# Altium PCB pcb.pcbdoc
Units mil, origin at the board's own origin, x right, y up, seen from the top; angles counter-clockwise.
Board outline 1573.37 x 1441.65 mil, 2 copper layers (Top Layer, Bottom Layer); 4 components, 6 nets, 24 pads, 1 vias.
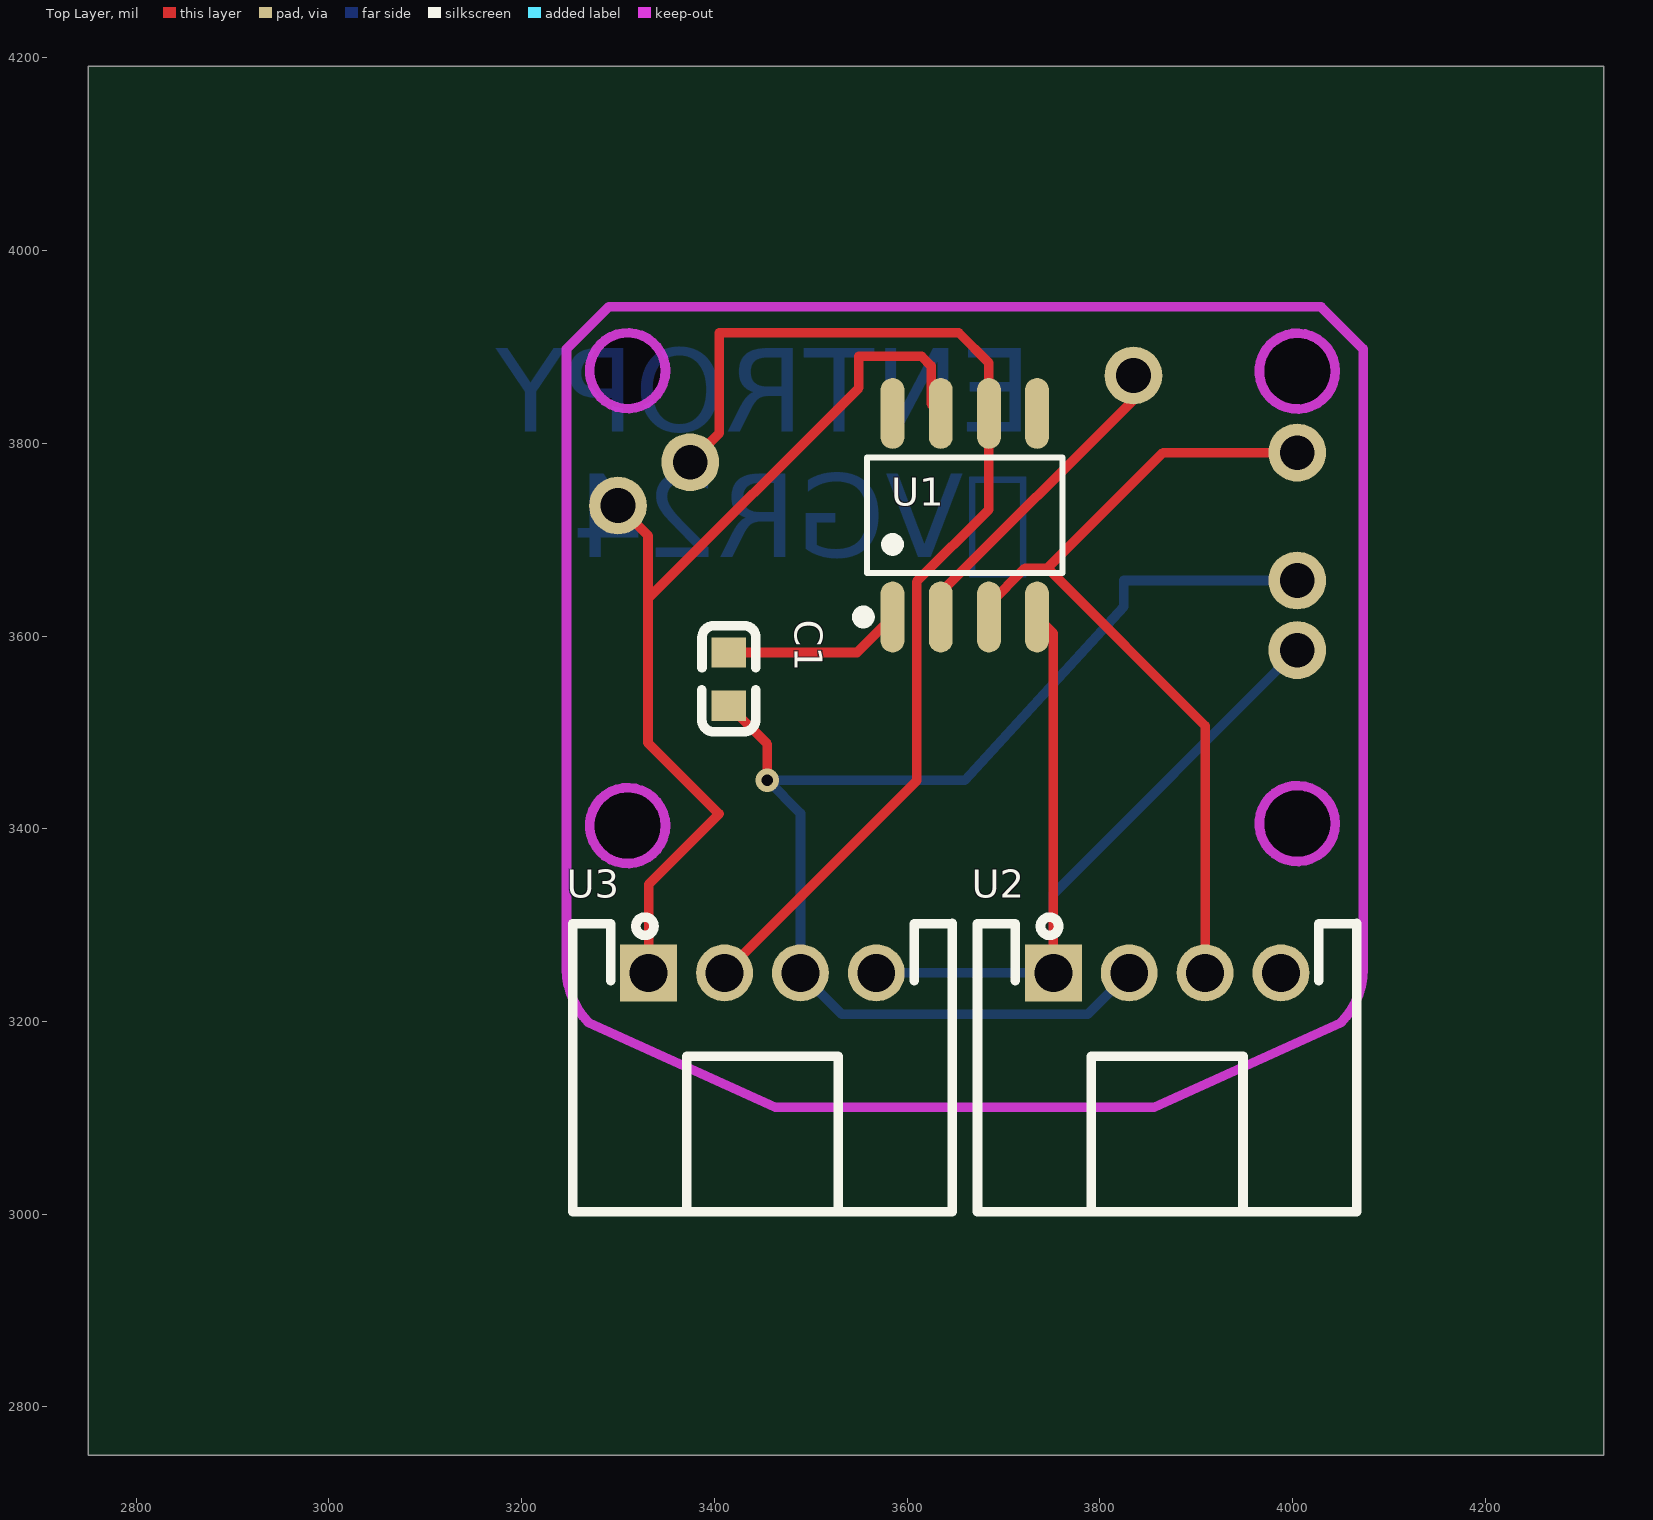
[diagram p0: Top Layer view]
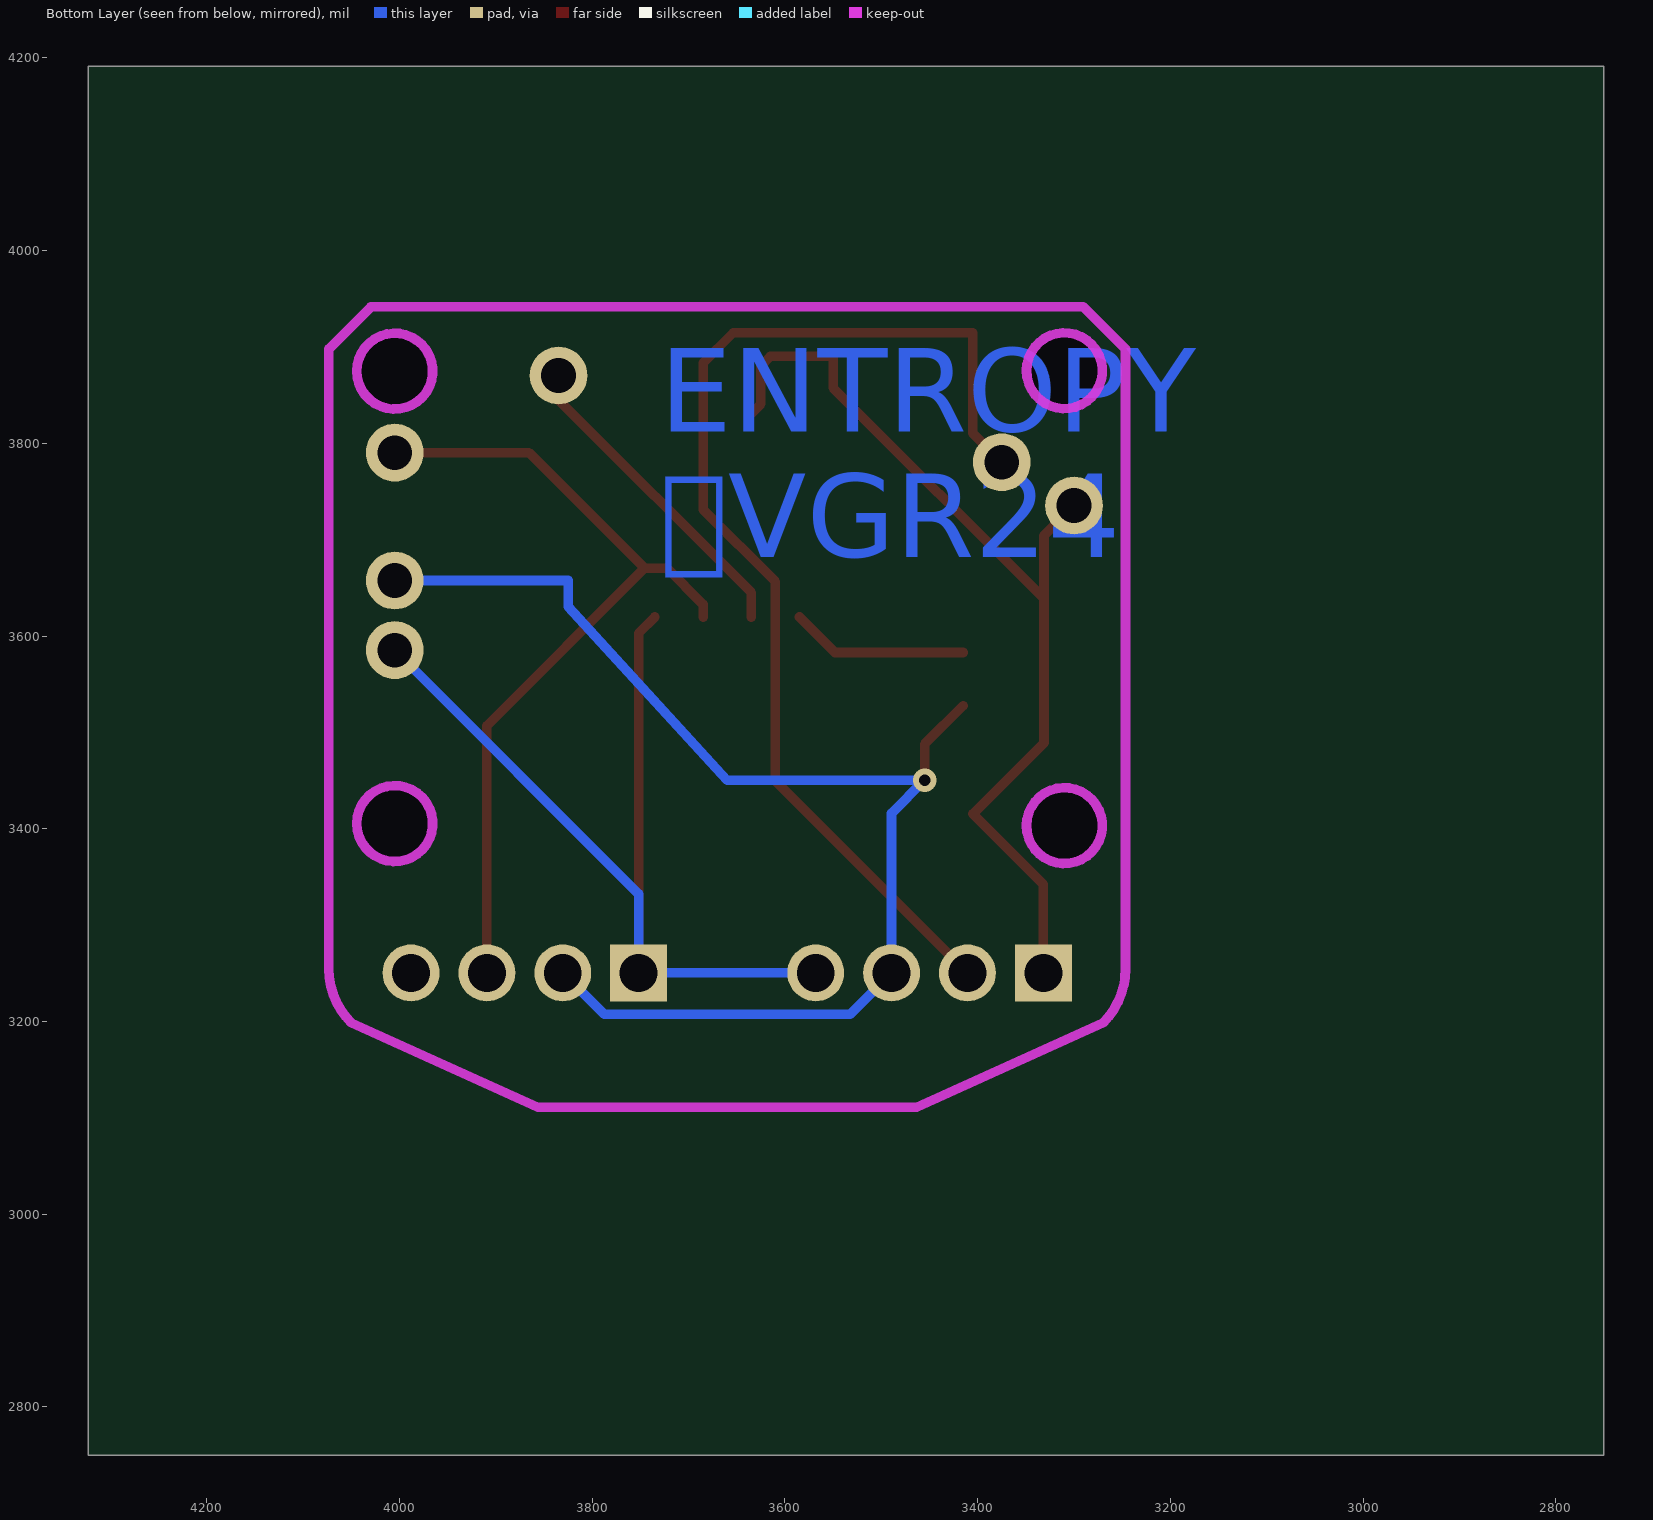
[diagram p1: Bottom Layer view, seen from below]

## Layer stack, top to bottom
Top Layer: signal copper (thickness not stored)
Dielectric: dielectric 12.6, FR-4, Dk 4.8
Bottom Layer: signal copper (thickness not stored)

## Board outline
4323.37,2750 2750,2750 2750,4191.65 4323.37,4191.65
cut-out: 3349.37,3875.43 ccw(c3310,3875.37) 3270.63,3875.43 ccw(c3310,3875.49)
cut-out: 4044.37,3405.43 ccw(c4005,3405.37) 3965.63,3405.43 ccw(c4005,3405.49)
cut-out: 4044.37,3874.96 ccw(c4005,3874.9) 3965.63,3874.96 ccw(c4005,3875.02)
cut-out: 3349.37,3403.3 ccw(c3310,3403.24) 3270.63,3403.3 ccw(c3310,3403.36)

## Components (designator, comment, footprint, x,y, rotation, side; value= is the part's Value field where it differs from the comment)
C1 "CAP_0603" C0603 3415,3555.43 r270 top
U1 "MT6701CT-STD" SOP-8_L4.9-W3.9-P1.27-LS6.0-BL 3660,3725.43 r0 top
U2 "S4B-PH-K-S(LF)(SN)" CONN-TH_4P-P2.00_S4B-PH-K-S-LF-SN 3870,3250.43 r0 top
U3 "S4B-PH-K-S(LF)(SN)" CONN-TH_4P-P2.00_S4B-PH-K-S-LF-SN 3450,3250.43 r0 top

## Footprints (in the part's own frame and the unit in brackets; to place one, negate y for a bottom-side part, rotate by r counter-clockwise, add the part's x,y. Pads: shape width x height; smd on the part's side, far side on the other; paste and mask are expansions set on the pad)
C0603 [mm]
  rect 0.8x0.9 smd: 1(-0.7,0) 2(0.7,0)
  silkscreen extent -1.41,-0.71 1.39,0.72
CONN-TH_4P-P2.00_S4B-PH-K-S-LF-SN [mm]
  rect 1.5x1.5 hole 1: 1(-3,0)
  round 1.5 hole 1: 2(-1,0) 3(1,0) 4(3,0)
  silkscreen extent -5,-6.3 5,1.47
SOP-8_L4.9-W3.9-P1.27-LS6.0-BL [mm]
  oval 0.63x1.865 smd: 1(-1.905,-2.682) 2(-0.635,-2.682) 3(0.635,-2.682) 4(1.905,-2.682) 5(1.905,2.682) 6(0.635,2.682) 7(-0.635,2.682) 8(-1.905,2.682)
  silkscreen extent -2.82,-2.83 2.58,1.52

## Free pads (board coordinates)
  round 60 hole 36: 9(3375,3780.43) 10(3300,3735.43) 11(4005,3790.43) 12(4005,3657.63) 13(4005,3585.43) 14(3835,3870.43)

## Via types
v1: diameter 24, hole 12, Top Layer to Bottom Layer, 1 vias

## Nets (pads, with @x,y where several pads share a name; then routed paths per layer and width w, separated by ;. In a path a pad name is that pad's centre, name@x,y a point inside that pad or via, vN(x,y) a via of type N, cw(c..) or ccw(c..) an arc to the next point about the centre after c; other vN are vias at no path point)
$1N830: U1.7 U3.1 | length 1033.7
  Top Layer w10: 3300,3735.43 3331.2,3704.23 3331.2,3638.84 ; U3.1 3331.89,3342.32 3405,3415.43 3331.2,3489.23 3331.2,3638.84 ; U1.7 3625,3841.04 3625,3880.43 3615,3890.43 3550,3890.43 3550,3857.64 3331.2,3638.84
$1N843: U1.6 U3.2 | length 1186.5
  Top Layer w10: 3375,3780.43 3405,3810.43 3405,3914.82 3653.7,3914.82 3685,3883.52 U1.6 ; U3.2 3610,3449.82 3610,3656.42 3685,3731.42 U1.6
$1N904: U1.3 U2.3 | length 886
  Top Layer w10: U1.3 3685,3632.82 3722.61,3670.43 3745.89,3670.43 ; U2.3 3909.4,3506.92 3745.89,3670.43 ; 4005,3790.43 3865.89,3790.43 3745.89,3670.43
$1N961: C1.1 U1.1 | length 185.3
  Top Layer w10: C1.1 3548.17,3582.99 U1.1
GND: U1.4 U2.1 U3.4 | length 1656.5
  Top Layer w10: U1.4 3751.9,3602.92 U2.1
  Bottom Layer w10: 3455,3450.43 3660.12,3450.43 3825,3630.43 3825,3657.63 4005,3657.63 ; U3.4 U2.1 3751.9,3332.33 4005,3585.43
VCC: C1.2 U2.2 U3.3 | length 685.2
  Top Layer w10: C1.2 3455,3487.87 v1(3455,3450.43)
  Bottom Layer w10: v1(3455,3450.43) 3489.4,3416.03 U3.3 3532.5,3207.32 3787.5,3207.32 U2.2
pads on no net: U1.2 U1.5 U1.8 U2.4
copper on no net: | length 333.5
  Top Layer w10: 3635,3619.82 3635,3645.03 3835,3845.03 3835,3870.43

## Keep-outs
Board Outline Layer:
  lines w10: 3246.6,3254.44 3246.6,3897.91 3290.34,3941.65 4029.63,3941.65 4073.37,3897.91 4073.37,3254.44 cw(c3994.63,3254.44) 4050.31,3198.76 3856.49,3111.02 3463.14,3111.02 3269.66,3198.76 cw(c3325.34,3254.44) 3246.6,3254.44
Multi-Layer:
  circle w10: c3310,3875.43 r39.37
  circle w10: c4005,3405.43 r39.37
  circle w10: c4005,3874.96 r39.37
  circle w10: c3310,3403.3 r39.37

## Other copper
Bottom Layer:
  text "ENTROPY /  VGR24" at 3729.84,3682.07 h86.82

## Silkscreen, mask and mechanical layers (free items; w line width, h text height)
Mechanical Layer:
  circle w1: c3310,3875.43 r39.37
  circle w1: c4005,3405.43 r39.37
  circle w1: c4005,3874.96 r39.37
  circle w1: c3310,3403.3 r39.37